# Altium PCB DIGLITE.PcbDoc
Units mm, origin at the board's own origin, x right, y up, seen from the top; angles counter-clockwise.
Board outline 50 x 50 mm, 2 copper layers (Top Layer, Bottom Layer); 5 components, 1 nets, 4 pads, 48 vias.
Unrouted connection lines stored in the file: 3.
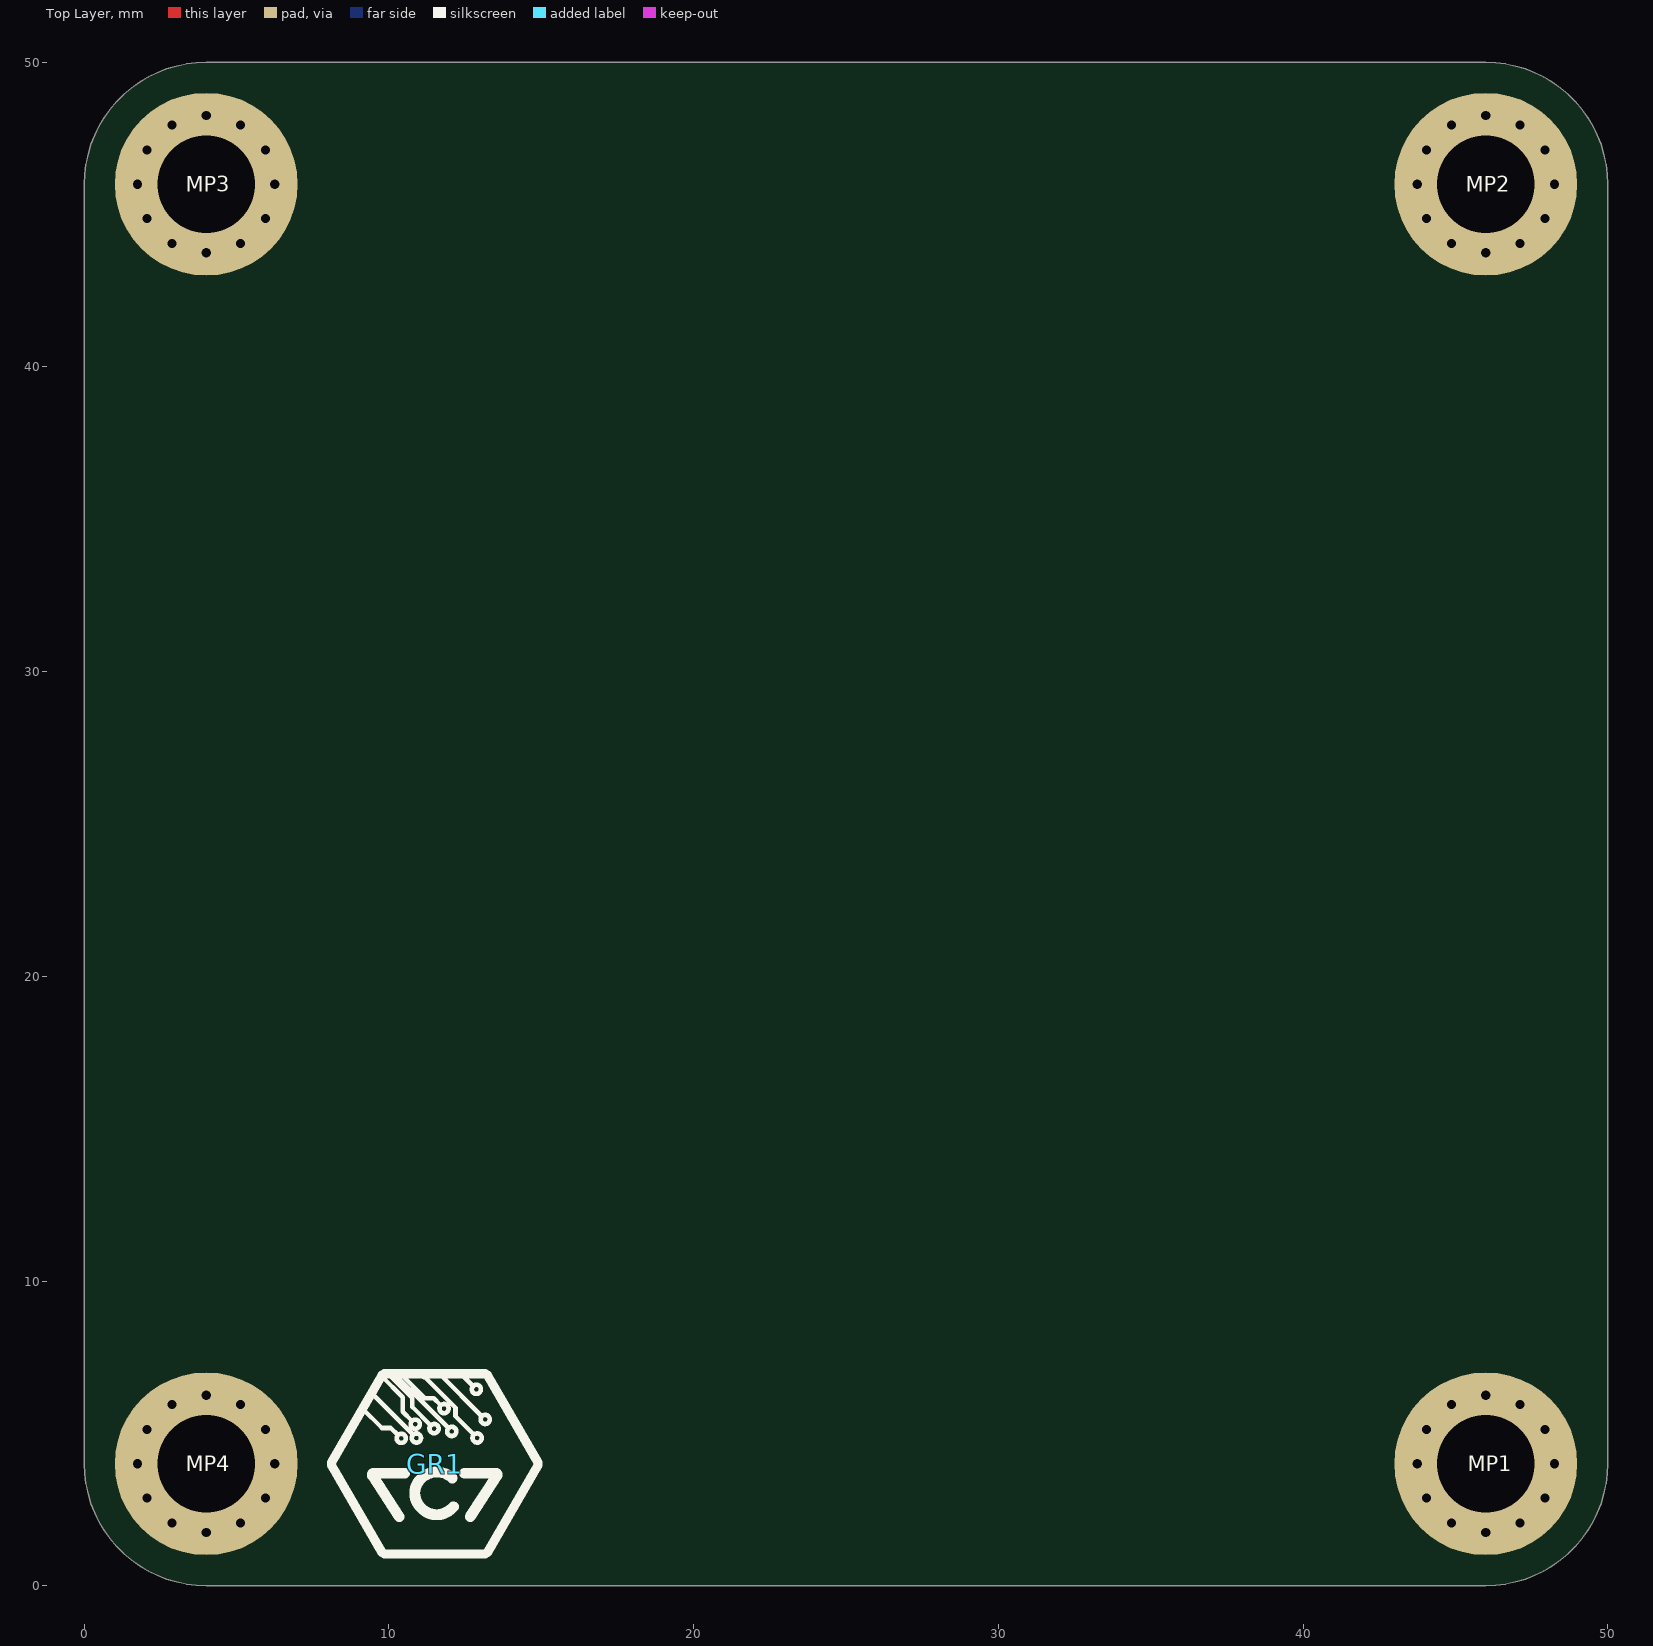
[diagram p0: Top Layer view]
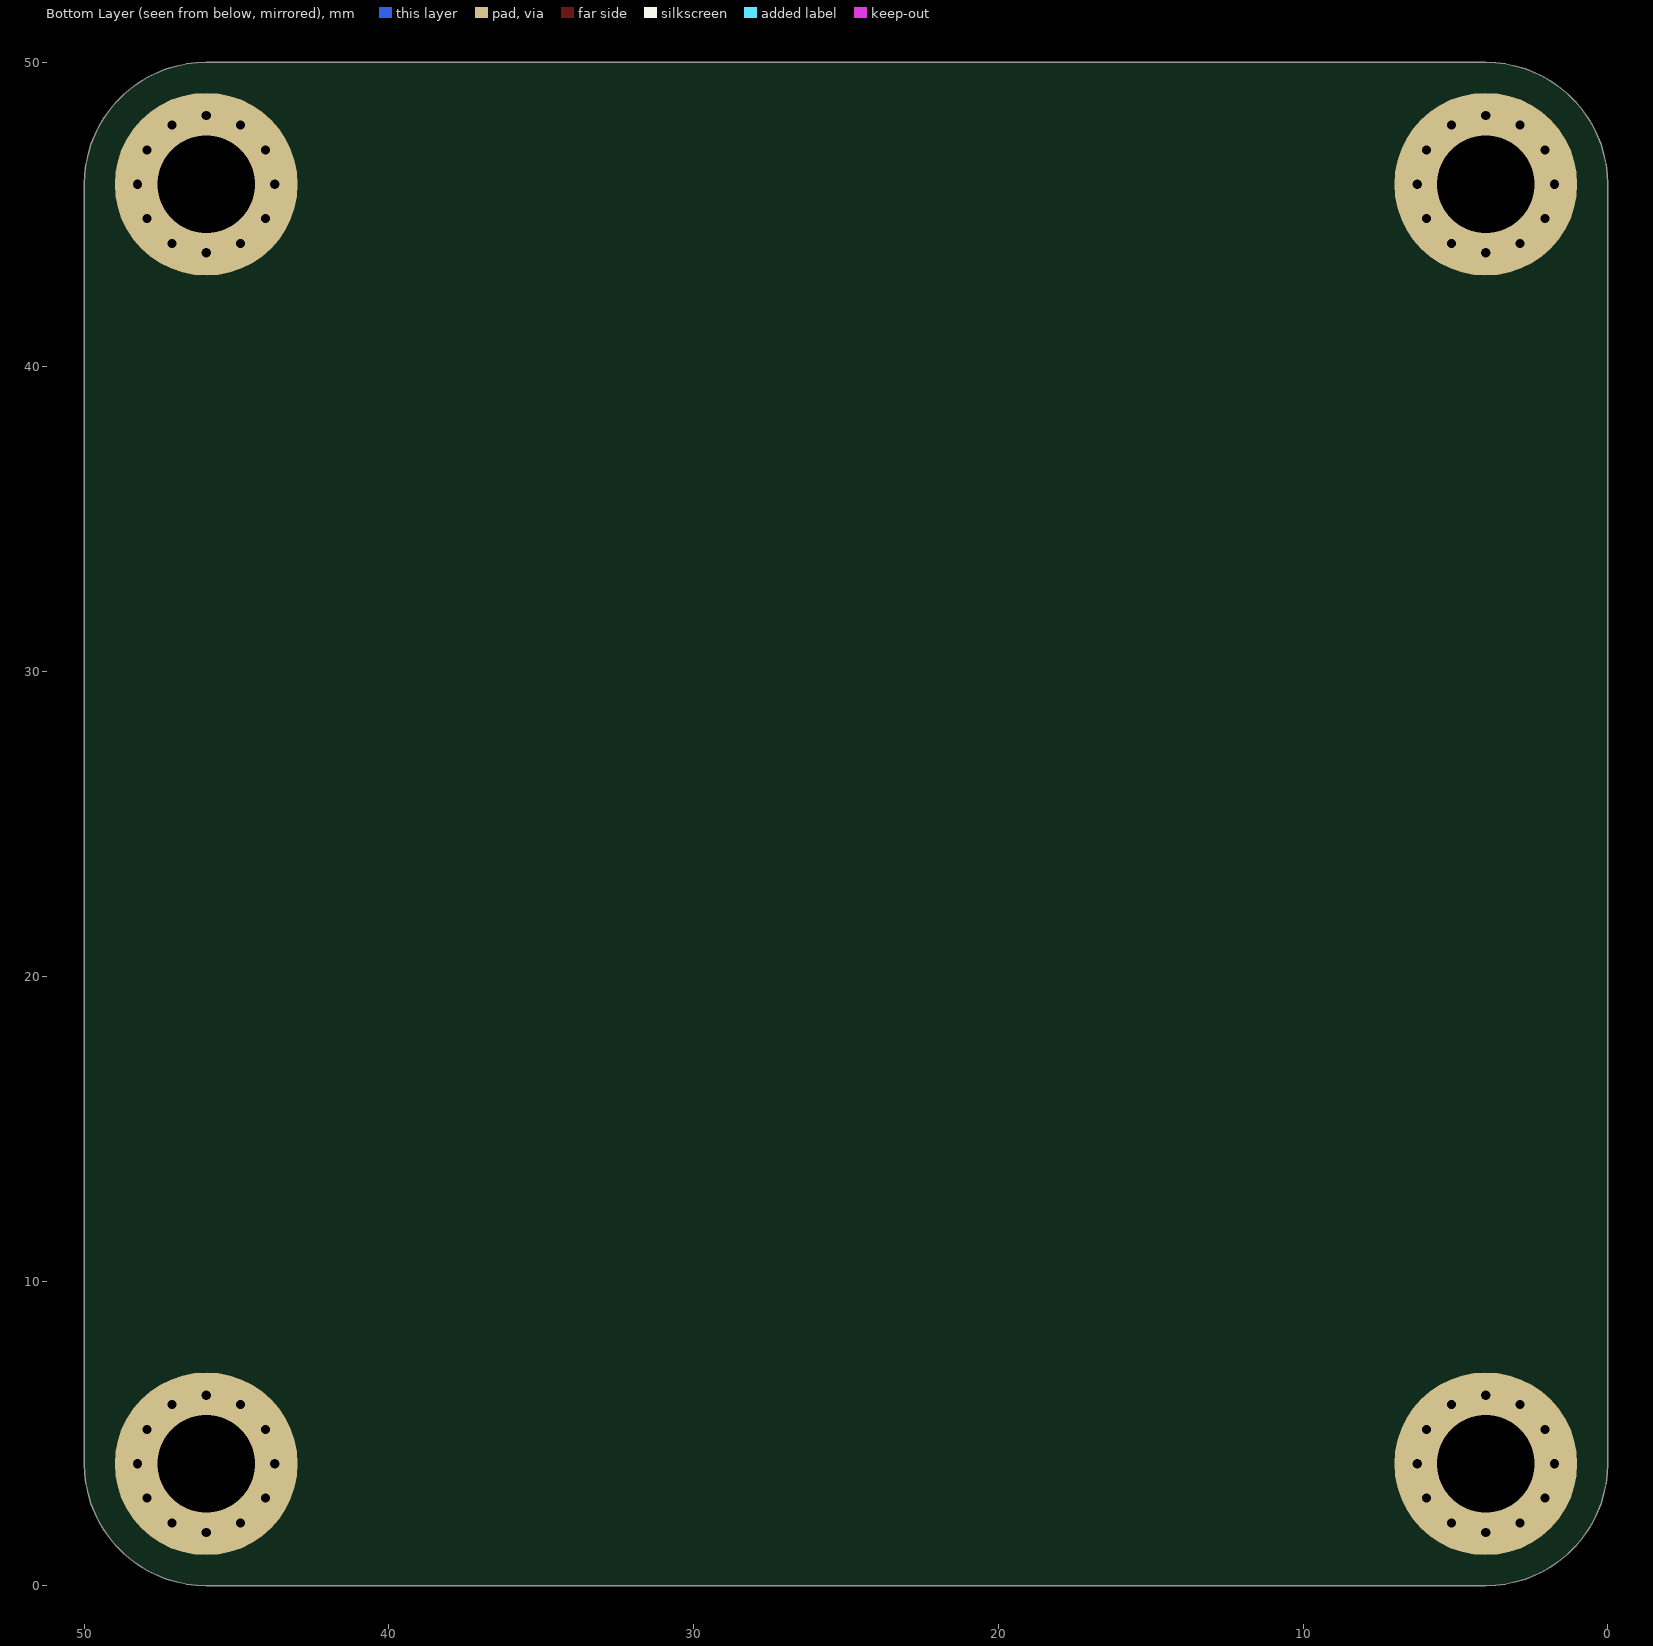
[diagram p1: Bottom Layer view, seen from below]

## Layer stack, top to bottom
Top Solder: solder mask 0.0102, Solder Resist, Dk 3.5
Top Layer: signal copper 0.0356
Dielectric 1: dielectric 0.32, FR-4, Dk 4.8
Bottom Layer: signal copper 0.0356
Bottom Solder: solder mask 0.0102, Solder Resist, Dk 3.5

## Board outline
0,4 ccw(c4,4) 4,0 46,0 ccw(c46,4) 50,4 50,46 ccw(c46,46) 46,50 4,50 ccw(c4,46) 0,46

## Design rules (kind name [scope] priority, off if disabled: settings)
BoardOutlineClearance [All] p1: gap=0.5 ignorepadtopadclearanceinfootprint=FALSE
Clearance Clearance_NPTH [(HoleDiameter > 0) and (PadIsPlated = 'False') vs IsElectrical = 'True'] p1: gap=0.2 ignorepadtopadclearanceinfootprint=FALSE
Clearance Clearance_Keepout [IsKeepOut] p2: gap=0 ignorepadtopadclearanceinfootprint=FALSE
Clearance Clearance_LV [All] p3: gap=0.15 ignorepadtopadclearanceinfootprint=FALSE
ComponentClearance ComponentClearance_OVERLAP [InComponentClass('OVERLAP') vs InComponentClass('OVERLAP')] p1: gap=0 collisioncheckmode=3 verticalgap=0 showdistances=FALSE
ComponentClearance ComponentClearance_NT [HasFootprint('NT 0.3') or HasFootprint('NT 1')] p2: gap=0 collisioncheckmode=3 verticalgap=0 showdistances=FALSE
ComponentClearance ComponentClearance_mech [OnMechanical] p3 off: gap=0 collisioncheckmode=3 verticalgap=0 showdistances=FALSE
ComponentClearance ComponentClearance_TP [HasFootprint('TP_1MM') vs HasFootprint('TP_1MM')] p4: gap=0.05 collisioncheckmode=3 verticalgap=0 showdistances=FALSE
ComponentClearance [All] p5: gap=0.2 collisioncheckmode=3 verticalgap=0.2 showdistances=FALSE
Height [All] p1: minheight=0 maxheight=60 prefheight=12.7
HoleSize [All] p1: absolutevalues=TRUE maxlimit=5 minlimit=0.25 maxpercent=80.000 minpercent=20.000
HoleToHoleClearance [All] p1: gap=0.2 allowstackedmicrovias=TRUE
MinimumAnnularRing [All] p1: minimumring=0.125
MinimumSolderMaskSliver [All] p1: minsoldermaskwidth=0
PolygonConnect PolygonConnect_mounting [HoleDiameter > 2] p1: connectstyle=Direct reliefconductorwidth=0.254 reliefentries=4 polygonreliefangle="90 Angle" airgapwidth=0.254
PolygonConnect [All] p2: thpad.connectstyle=Relief thpad.reliefconductorwidth=0.254 thpad.reliefentries=4 thpad.polygonreliefangle="90 Angle" thpad.airgapwidth=0.254 smdpad.connectstyle=Relief smdpad.reliefconductorwidth=0.254 smdpad.reliefentries=4 smdpad.polygonreliefangle="90 Angle" smdpad.airgapwidth=0.254 via.connectstyle=Direct via.reliefconductorwidth=0.254 via.reliefentries=4 via.polygonreliefangle="90 Angle" via.airgapwidth=0.254
RoutingVias [All] p1: holewidth=0.3 width=0.6 viastyle="Through Hole" minholewidth=0.2 minwidth=0.4 maxholewidth=0.711 maxwidth=1.27
SilkToSilkClearance [All] p1: silktosilkclearance=0
SilkToSolderMaskClearance [IsPad] p1: minsilkscreentomaskgap=0 clearancetoexposedcopper=TRUE
SolderMaskExpansion [All] p1: expansion=0.125 istentingtop=FALSE
SupplyNets "Schematic Supply Nets" [InNet('GND')] p1: voltage=0.000
UnRoutedNet [not InNet('NC')] p1: checkbadconnections=TRUE
Width [All] p1: maxlimit=6 minlimit=0.15 preferedwidth=0.2
22 further rules are at their usual default settings.

## Components (designator, comment, footprint, x,y, rotation, side; value= is the part's Value field where it differs from the comment)
GR1 "LOGO_7c7_2023" LOGO_7c7_2023_Silk_6mm 11.5,4 r0 top
MP1 "MountingHole" PTH-M3D6.5_VIA-RING 46,4 r0 top
MP2 "MountingHole" PTH-M3D6.5_VIA-RING 46,46 r0 top
MP3 "MountingHole" PTH-M3D6.5_VIA-RING 4,46 r0 top
MP4 "MountingHole" PTH-M3D6.5_VIA-RING 4,4 r0 top

## Footprints (in the part's own frame and the unit in brackets; to place one, negate y for a bottom-side part, rotate by r counter-clockwise, add the part's x,y. Pads: shape width x height; smd on the part's side, far side on the other; paste and mask are expansions set on the pad)
LOGO_7c7_2023_Silk_6mm [mm]
  silkscreen extent -3.4,-2.96 3.4,2.96
PTH-M3D6.5_VIA-RING [mm]
  round 6 hole 3.2: 1(0,0)

## Part data
GR1: library part CMP-001-0035-1, "The 7c7 logo: Be proud of our designs and stamp that logo on there!"
MP1 MP2 MP3 MP4: library part CMP-00028-00004-15, "Mounting hole.  Add this so that mounting holes placed in your design don't automagically disappear when you import changes from the schematic.", Pins=1

## Via types
v1: diameter 0.6, hole 0.3, Top Layer to Bottom Layer, 48 vias

## Nets (pads, with @x,y where several pads share a name; then routed paths per layer and width w, separated by ;. In a path a pad name is that pad's centre, name@x,y a point inside that pad or via, vN(x,y) a via of type N, cw(c..) or ccw(c..) an arc to the next point about the centre after c; other vN are vias at no path point)
GND: MP1.1 MP2.1 MP3.1 MP4.1
  other v1: 4,1.75 46,1.75 2.875,2.051 5.125,2.051 44.875,2.051 47.125,2.051 2.051,2.875 5.949,2.875 44.051,2.875 47.949,2.875 1.75,4 6.25,4 43.75,4 48.25,4 2.051,5.125 5.949,5.125 44.051,5.125 47.949,5.125 2.875,5.949 5.125,5.949 44.875,5.949 47.125,5.949 4,6.25 46,6.25 4,43.75 46,43.75 2.875,44.051 5.125,44.051 44.875,44.051 47.125,44.051 2.051,44.875 5.949,44.875 44.051,44.875 47.949,44.875 1.75,46 6.25,46 43.75,46 48.25,46 2.051,47.125 5.949,47.125 44.051,47.125 47.949,47.125 2.875,47.949 5.125,47.949 44.875,47.949 47.125,47.949 4,48.25 46,48.25

## Silkscreen, mask and mechanical layers (free items; w line width, h text height)
Board outline:
  the board outline again, w0.1